# Altium PCB hexboard_35.PcbDoc
Units mm, origin at the board's own origin, x right, y up, seen from the top; angles counter-clockwise.
Board outline 70 x 60.62 mm, 2 copper layers (Top Layer, Bottom Layer); 63 components, 40 nets, 247 pads, 13 vias.
Unrouted connection lines stored in the file: 117.
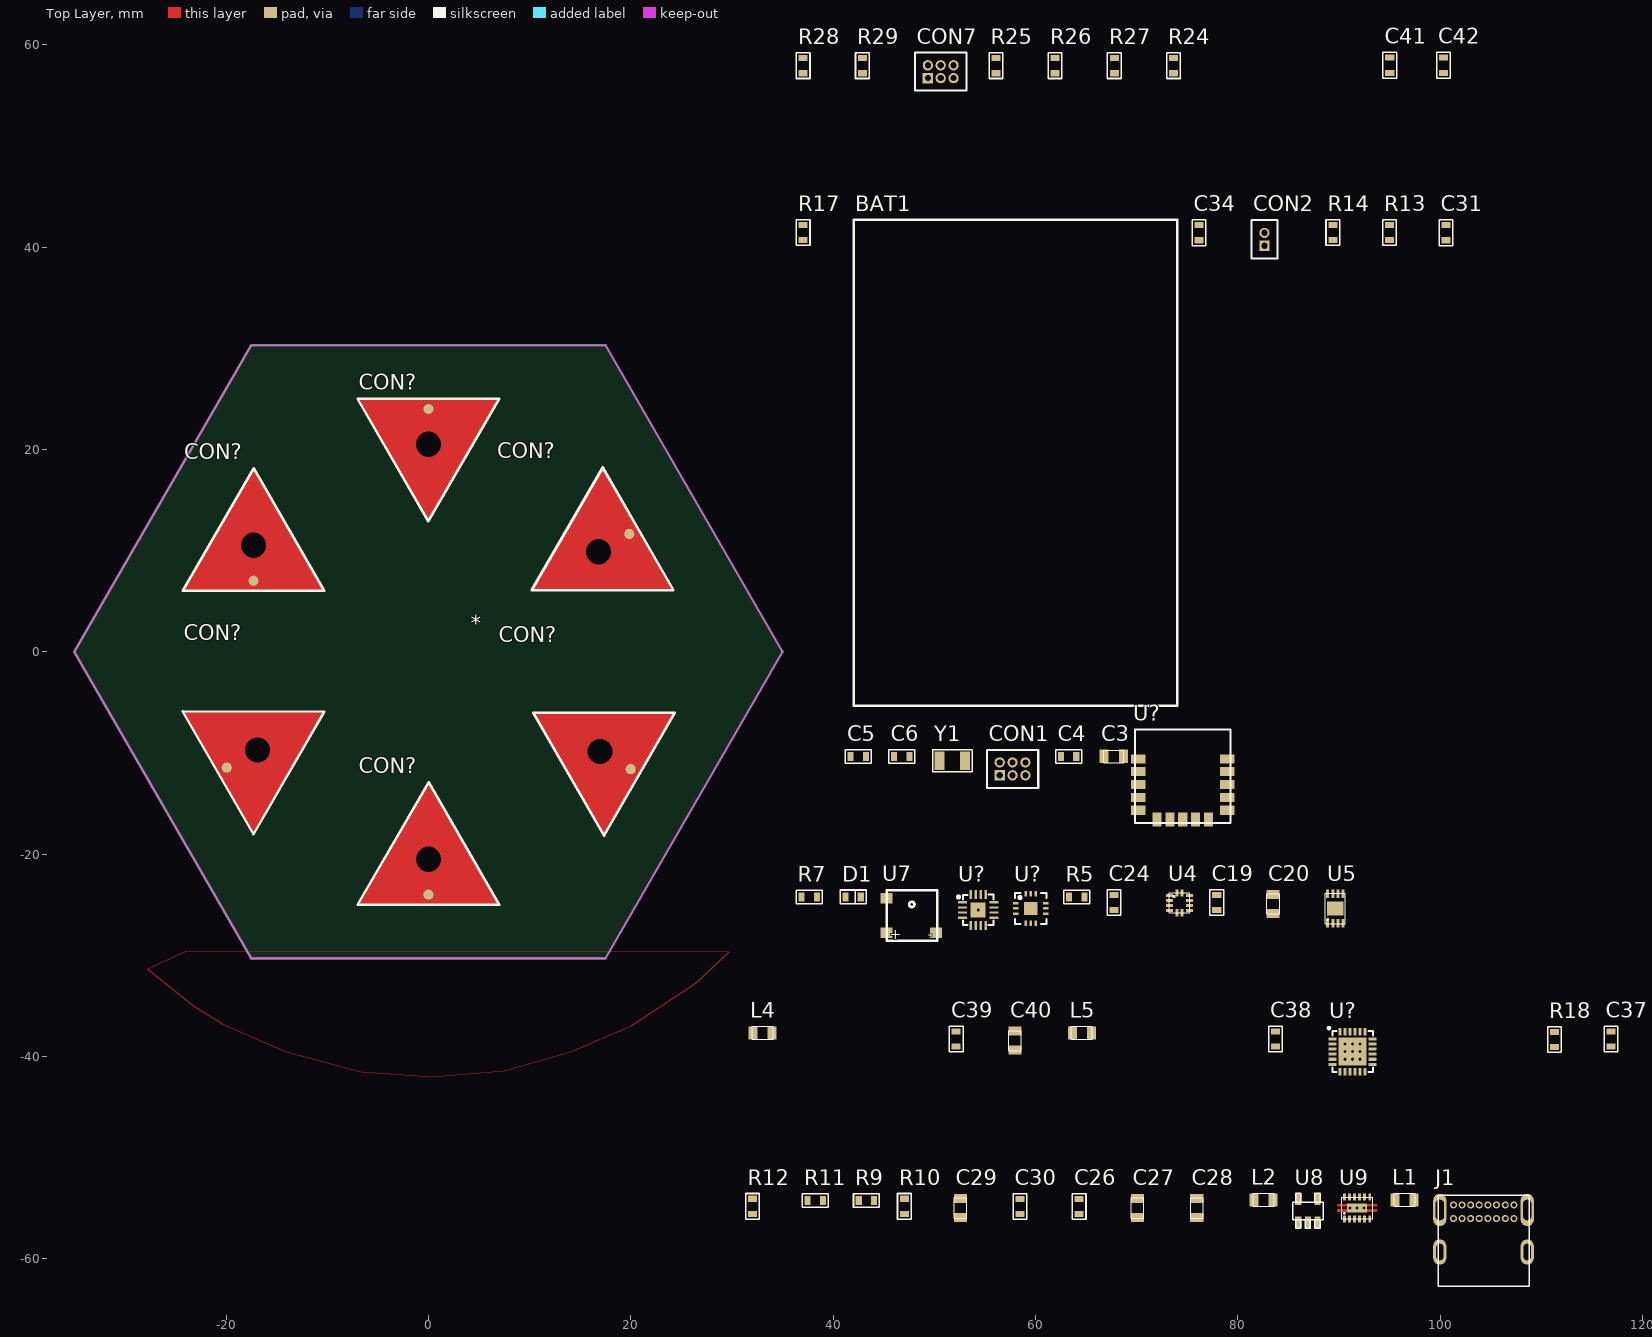
[diagram p0: Top Layer view]
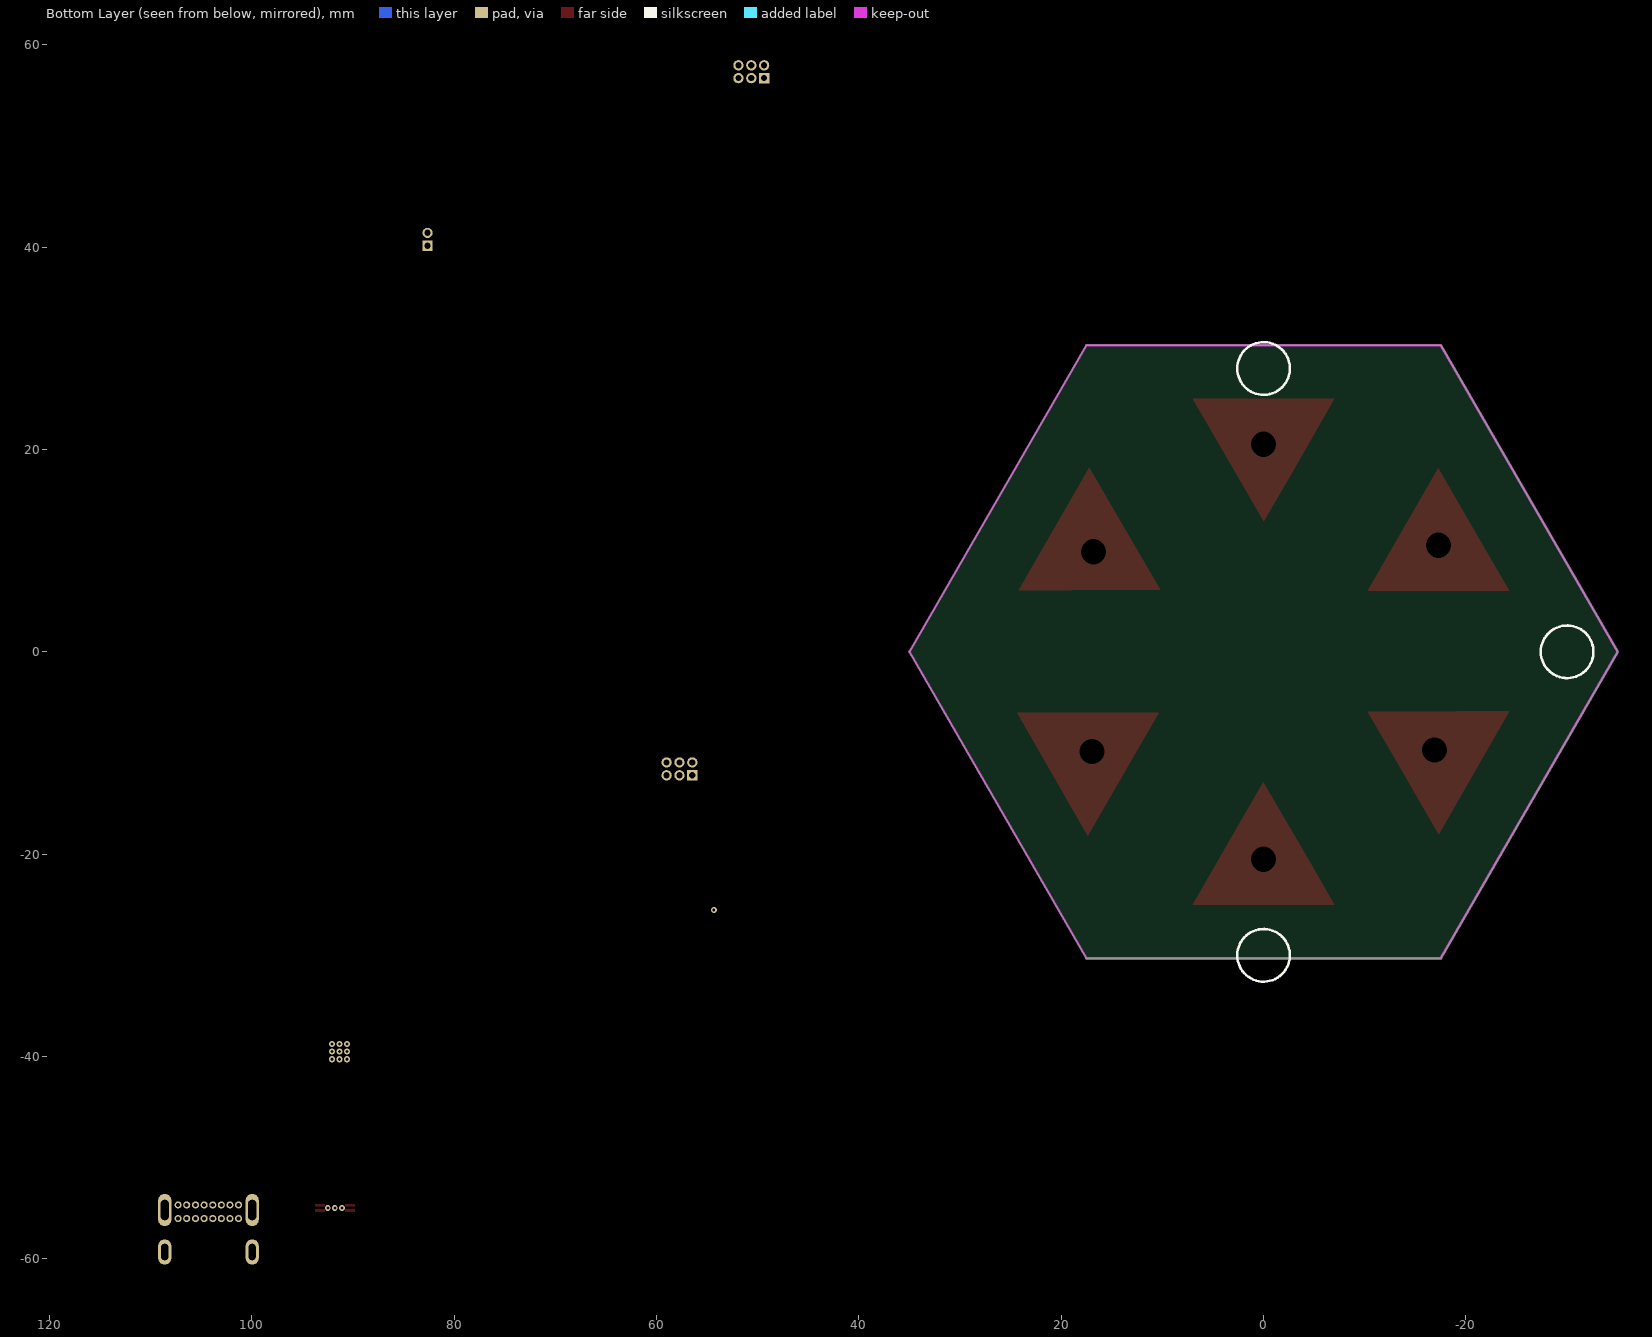
[diagram p1: Bottom Layer view, seen from below]

## Layer stack, top to bottom
Top Solder: solder mask 0.0102, Solder Resist, Dk 3.5
Top Layer: signal copper 0.0356
Dielectric1: dielectric 0.32, FR-4, Dk 4.8
Bottom Layer: signal copper 0.0356
Bottom Solder: solder mask 0.0102, Solder Resist, Dk 3.5

## Board outline
-17.5,-30.311 17.5,-30.311 35,0 17.5,30.311 -17.5,30.311 -35,0

## Design rules (kind name [scope] priority, off if disabled: settings)
Clearance [All] p1: gap=0.203 ignorepadtopadclearanceinfootprint=FALSE except(0: Arc-Hole Track-Hole SMDPad-Hole THPad-Hole Via-Hole Fill-Hole Poly-Hole Region-Hole Text-Hole; 0.102: Arc-SMDPad Arc-THPad Arc-Via Track-SMDPad Track-THPad Track-Via SMDPad-SMDPad SMDPad-THPad SMDPad-Via THPad-THPad THPad-Via)
ComponentClearance [All] p1 off: gap=0.254 collisioncheckmode=3 verticalgap=0.254 showdistances=FALSE
HoleSize [All] p1: absolutevalues=TRUE maxlimit=3.81 minlimit=0.025 maxpercent=80.000 minpercent=20.000
PlaneConnect [All] p1: planeconnectstyle=Direct reliefexpansion=0.508 reliefentries=4 reliefconductorwidth=0.254 reliefairgap=0.254
PolygonConnect PolygonConnect_vias [All] p1: thpad.connectstyle=Direct thpad.reliefconductorwidth=0.254 thpad.reliefentries=4 thpad.polygonreliefangle="90 Angle" thpad.airgapwidth=0.254 smdpad.connectstyle=Relief smdpad.reliefconductorwidth=0.254 smdpad.reliefentries=4 smdpad.polygonreliefangle="90 Angle" smdpad.airgapwidth=0.254 via.connectstyle=Direct via.reliefconductorwidth=0.254 via.reliefentries=4 via.polygonreliefangle="90 Angle" via.airgapwidth=0.254
RoutingVias [All] p1: holewidth=0.406 width=0.635 viastyle="Through Hole" minholewidth=0.254 minwidth=0.457 maxholewidth=0.406 maxwidth=1.27
SilkToSolderMaskClearance SilkscreenOverComponentPads [IsPad] p1: minsilkscreentomaskgap=0.254 clearancetoexposedcopper=TRUE
SolderMaskExpansion [All] p1: expansion=0.076 istentingtop=FALSE
Width [All] p1: maxlimit=2.54 minlimit=0.203 preferedwidth=0.203 minimp=50.000000 maximp=50.000000 favimp=50.000000
26 further rules are at their usual default settings.

## Classes and differential pairs
component class Accessories: C19 C20 C24 D1 R5 R7 U4 U5 U7 U?
component class Supply: BAT1 BT1 C26 C27 C28 C29 C30 C31 C34 CON2 J1 L1 L2 R9 R10 R11 R12 R13 R14 R17 U8 U9
component class CPU: * C3 C4 C5 C6 CON1 U? Y1
component class Touch_panel: C37 C38 C39 C40 C41 C42 CON7 CON? L4 L5 R18 R24 R25 R26 R27 R28 R29 U?

## Components (designator, comment, footprint, x,y, rotation, side; value= is the part's Value field where it differs from the comment)
* "LOGO" NEWLOGO2 5.7,-0.2 r0 top
BAT1 "BAT" "LI-ion battery 1100mAh" 74.03,-5.32 r90 top
C3 "1uF" C0805L 67.73,-10.32 r0 top
C4 "100nF" C0603L 63.28,-10.32 r0 top
C5 "8.2pF" C0603L 42.48,-10.32 r0 top
C6 "8.2pF" C0603L 46.78,-10.32 r0 top
C19 "100nF" C0603L 77.88,-24.77 r90 top
C20 "10uF" C0805L 83.48,-24.92 r90 top
C24 "100nF" C0603L 67.73,-24.77 r90 top
C26 "1uF" C0603L 64.28,-54.82 r90 top
C27 "10uF" C0805L 70.08,-54.97 r90 top
C28 "10uF" C0805L 75.93,-54.97 r90 top
C29 "10uF" C0805L 52.58,-54.97 r90 top
C30 "100nF" C0603L 58.43,-54.82 r90 top
C31 "1uF" C0603L 100.53,41.43 r90 top
C34 "100nF" C0603L 76.13,41.43 r90 top
C37 "100nF" C0603L 116.829,-38.27 r90 top
C38 "100nF" C0603L 83.679,-38.27 r90 top
C39 "100nF" C0603L 52.13,-38.27 r90 top
C40 "10uF" C0805L 57.98,-38.42 r90 top
C41 "100nF" C0603L 94.98,57.98 r90 top
C42 "1uF" C0603L 100.28,57.98 r90 top
CON1 "SWD" HDR2x3_1mm27 57.73,-11.57 r0 top
CON2 "Battery" HDR1X2_1mm27 82.63,40.13 r90 top
CON7 "SWD" HDR2x3_1mm27 50.63,57.33 r0 top
CON? "Header1" P_CAP_TRIANGLE_14 1107,1125 r180 top
CON? "Header1" P_CAP_TRIANGLE_14 -1107,-1125 r0 top
CON? "Header1" P_CAP_TRIANGLE_14 -1526.925,396.74 r300 top
CON? "Header1" P_CAP_TRIANGLE_14 1526.844,-396.54 r120 top
CON? "Header1" P_CAP_TRIANGLE_14 419.987,-1520.786 r60 top
CON? "Header1" P_CAP_TRIANGLE_14 -1124.285,-1093.979 r0 top
D1 "4148" 0603-DIODE 41.23,-24.22 r0 top
J1 "USB_C_16_PIN" USB_C_16_PIN 99.779,-62.72 r0 top
L1 "2.2uH" L0805 96.479,-54.17 r0 top
L2 "EMI 300R/100MHz" L0805 82.529,-54.17 r0 top
L4 "BLM18PG471SN1" L0805 33.03,-37.67 r0 top
L5 "BLM18PG471SN1" L0805 64.58,-37.67 r0 top
R5 "RES" 1608[0603] 64.08,-24.22 r0 top
R7 "100k" 1608[0603] 37.63,-24.22 r0 top
R9 "2k-1%" 1608[0603] 43.28,-54.22 r0 top
R10 "100R" 1608[0603] 47.03,-54.82 r90 top
R11 "4k7*" 1608[0603] 38.23,-54.22 r0 top
R12 "1M" 1608[0603] 32.03,-54.82 r90 top
R13 "33k" 1608[0603] 94.98,41.43 r90 top
R14 "47k" 1608[0603] 89.38,41.43 r90 top
R17 "100k" 1608[0603] 37.03,41.43 r90 top
R18 "100k" 1608[0603] 111.279,-38.32 r90 top
R24 "1k" 1608[0603] 73.63,57.93 r90 top
R25 "1k" 1608[0603] 56.08,57.93 r90 top
R26 "1k" 1608[0603] 61.93,57.93 r90 top
R27 "1k" 1608[0603] 67.78,57.93 r90 top
R28 "1k" 1608[0603] 37.03,57.93 r90 top
R29 "1k" 1608[0603] 42.88,57.93 r90 top
U4 "LIS2DH12" LGA50P200X200X100-12N 74.23,-24.82 r0 top
U5 "ATECC508A" UDFN 88.88,-26.82 r0 top
U7 "BUZZER" SMT28 45.28,-28.57 r0 top
U8 "MCP73831" SOT23-5 86.929,-55.17 r0 top
U9 "TPS62742DSS" R-PWSON-N12_2 91.779,-54.97 r0 top
U? "MAS6240" QFN50P300X300X100-12L 59.53,-25.37 r0 top
U? "PCA6408ABS" HVQFN16_3x3x085 54.33,-25.52 r0 top
U? "YJ-17095-nRF52832" YJ-17095 69.85,-16.93 r0 top
U? "ATSAML10_24" QFN24_4x4 91.329,-39.52 r0 top
Y1 "32768" X_FC-13F 51.78,-10.77 r0 top

## Footprints (in the part's own frame and the unit in brackets; to place one, negate y for a bottom-side part, rotate by r counter-clockwise, add the part's x,y. Pads: shape width x height; smd on the part's side, far side on the other; paste and mask are expansions set on the pad)
0603-DIODE [mm]
  rect 0.6x0.9 smd: 1(0,0) 2(1.5,0)
  silkscreen extent -0.52,-0.68 2.03,0.67, body extent -0.05,-0.4 1.55,0.4, height 0.66
1608[0603] [mm] "Body 1.6 x 0.8 mm (LxW typ)"
  rect 0.6x0.9 smd: 1(-0.75,-0.01) 2(0.76,-0.01)
  silkscreen extent -1.27,-0.68 1.28,0.67, body extent -0.75,-0.43 0.79,0.42, height 0.45
C0603L [mm]
  rect 0.6x0.9 smd: 1(-0.76,-0.03) 2(0.75,-0.03)
  silkscreen extent -1.28,-0.71 1.27,0.64, body extent -0.8,-0.43 0.8,0.37, height 0.8
C0805L [mm]
  rect 0.9x1.3 smd: 1(-0.95,0) 2(0.95,0)
  silkscreen extent -0.99,-0.64 0.99,0.61, body extent -1,-0.62 1,0.63, height 0.6
HDR1X2_1mm27 [mil]
  rect 40x40 hole 25: 1(0,0)
  round 40 hole 25: 2(50.02,-0.01)
  silkscreen extent -50,-50 101,50
HDR2x3_1mm27 [mil]
  rect 40x40 hole 24: 1(-50,-25)
  round 40 hole 24: 2(-50,25) 3(0,-25) 4(0,25) 5(50,-25) 6(50,25)
  silkscreen extent -100,-74 100,74
HVQFN16_3x3x085 [mm]
  rect 0.9x0.24 smd paste-0.025 mask+0.05: 1(-1.55,0.75) 2(-1.55,0.25) 3(-1.55,-0.25) 4(-1.55,-0.75) 9(1.55,-0.75) 10(1.55,-0.25) 11(1.55,0.25) 12(1.55,0.75)
  rect 0.24x0.9 smd paste-0.025 mask+0.05: 5(-0.75,-1.55) 6(-0.25,-1.55) 7(0.25,-1.55) 8(0.75,-1.55) 13(0.75,1.55) 14(0.25,1.55) 15(-0.25,1.55) 16(-0.75,1.55)
  rect 1.5x1.5 smd paste-2.54 mask+0.05: 17(0,0)
  silkscreen extent -2.07,-1.5 1.5,1.51, body extent -1.52,-1.52 1.53,1.52, height 1.01
L0805 [mm] "Chip Inductor; Body 2.0 x 1.3 mm (LxW typ)"
  rect 0.9x1.3 smd: 1(-0.94,0) 2(0.94,0)
  silkscreen extent -1.03,-0.62 1.05,0.64, body extent -0.99,-0.59 1.01,0.61, height 1.3
LGA50P200X200X100-12N [mm] "LGA, 12-Leads, Body 2.00x2.00mm, Pitch 0.50mm, IPC Medium Density"
  rect 0.7x0.3 smd paste-0.025 mask+0.05: 1(-0.975,0.75) 2(-0.975,0.25) 3(-0.975,-0.25) 4(-0.975,-0.75) 7(0.975,-0.75) 8(0.975,-0.25) 9(0.975,0.25) 10(0.975,0.75)
  rect 0.3x0.7 smd paste-0.025 mask+0.05: 5(-0.25,-0.975) 6(0.25,-0.975) 11(0.25,0.975) 12(-0.25,0.975)
  silkscreen extent -0.99,-1 1,1, body extent -1,-1 1,1, height 1.01
"LI-ion battery 1100mAh" [mm]
  round 1.524 on Top Overlay: 1(47,30) 2(47,28) 3(47,26)
  silkscreen extent 0,0 48,32, body extent 0,0 48,32, height 6.4
NEWLOGO2 [mm]
P_CAP_TRIANGLE_14 [mm]
  round 1 smd mask+0.102: 1(1107,1101)
  round 0 hole 2.5 unplated: 2(1107,1104.5)
  Top Layer region: 1107.02,1112.12 1102.606,1104.5 1100,1100 1114,1100 1109.64,1107.58
  silkscreen extent 1100,1100 1114,1112.12
QFN24_4x4 [mm]
  rect 0.75x0.3 smd mask+0.05: 1(-1.975,1.25) 2(-1.975,0.75) 3(-1.975,0.25) 4(-1.975,-0.25) 5(-1.975,-0.75) 6(-1.975,-1.25) 13(1.975,-1.25) 14(1.975,-0.75) 15(1.975,-0.25) 16(1.975,0.25) 17(1.975,0.75) 18(1.975,1.25)
  rect 0.3x0.75 smd mask+0.05: 7(-1.25,-1.975) 8(-0.75,-1.975) 9(-0.25,-1.975) 10(0.25,-1.975) 11(0.75,-1.975) 12(1.25,-1.975) 19(1.25,1.975) 20(0.75,1.975) 21(0.25,1.975) 22(-0.25,1.975) 23(-0.75,1.975) 24(-1.25,1.975)
  rect 2.75x2.75 smd paste-100 mask+0.05: 25(0,0)
  silkscreen extent -2.45,-2.03 2.03,2.45, body extent -2,-2 2,2, height 1
QFN50P300X300X100-12L [mm] "QFN, 12-Leads, Body 3.0x3.0mm (max), Pitch 0.50mm, IPC High Density"
  rect 0.55x0.25 smd: 1(-1.475,0.5) 2(-1.475,0) 3(-1.475,-0.5) 7(1.475,-0.5) 8(1.475,0) 9(1.475,0.5)
  rect 0.25x0.55 smd: 4(-0.5,-1.475) 5(0,-1.475) 6(0.5,-1.475) 10(0.5,1.475) 11(0,1.475) 12(-0.5,1.475)
  rect 1.3x1.3 smd: 13(0,0)
  silkscreen extent -1.55,-1.55 1.55,1.55, body extent -1.51,-1.51 1.51,1.51, height 0.78
R-PWSON-N12_2 [mm]
  rect 0.28x0.7 smd paste-1000 mask+0.05: 1(-1.25,-1.1) 2(-0.75,-1.1) 3(-0.25,-1.1) 4(0.25,-1.1) 5(0.75,-1.1) 6(1.25,-1.1) 7(1.25,1.1) 8(0.75,1.1) 9(0.25,1.1) 10(-0.25,1.1) 11(-0.75,1.1) 12(-1.25,1.1)
  rect 2x0.9 smd paste-1000 mask+0.05: 13(0,0)
  Top Layer region: -2,0.125 -1,0.125 -1,0.375 -2,0.375
  Top Layer region: -2,-0.375 -1,-0.375 -1,-0.125 -2,-0.125
  Top Layer region: 1.975,-0.125 0.975,-0.125 0.975,-0.375 1.975,-0.375
  Top Layer region: 1.975,0.375 0.975,0.375 0.975,0.125 1.975,0.125
  silkscreen extent -1.55,-1.05 1.55,1.06, body extent -1.55,-1.06 1.55,1.06, height 0.8
SMT28 [mm]
  rect 1.2x1.016 smd: 0(0,4.2) 1(0,0.8) 2(4.9,0.8)
  silkscreen extent 0,0 5,5, body extent 0,-0.03 5.02,4.97, height 2
SOT23-5 [mil]
  rect 24x45 smd: 1(-38,-48) 2(-0.5,-48) 3(37,-48) 4(37,42) 5(-38,42)
  silkscreen extent -59,-71 59,65, body extent -60,-62 58,56, height 58
UDFN [mm]
  rect 1.6x1.4 smd: 0(0.75,1.45)
  rect 0.3x0.85 smd paste-0.025 mask+0.05: 1(0,0) 1(0,0) 2(0.5,0) 2(0.5,0) 3(1,0) 4(1.5,0) 5(1.5,2.9) 6(1,2.9) 7(0.5,2.9) 8(0,2.9)
  silkscreen extent -0.25,-0.05 1.75,2.95, body extent -0.25,-0.05 1.75,2.95, height 0.53
USB_C_16_PIN [mm]
  oval 1.3x2.5 hole 0.7 slot 1.6 at 90 deg: 0(0.18,3.4) 0(8.82,3.4)
  oval 1.3x3.2 hole 0.8 slot 2 at 90 deg: 0(0.18,7.55) 0(8.82,7.55)
  round 0.7 hole 0.4: A1(1.53,8.05) A4(2.38,8.05) A5(3.23,8.05) A6(4.075,8.05) A7(4.925,8.05) A8(5.78,8.05) A9(6.65,8.05) A12(7.5,8.05) B1(7.5,6.7) B4(6.65,6.7) B5(5.78,6.7) B6(4.925,6.7) B7(4.075,6.7) B8(3.23,6.7) B9(2.38,6.7) B12(1.53,6.7)
  silkscreen extent 0,0 9,9, body extent 0.02,-0.03 8.97,9.14, height 3.46
X_FC-13F [mm] "Crystal 3.2x1.5x0.55"
  rect 1x1.8 smd: 1(-1.255,0) 2(1.245,0)
  silkscreen extent -1.96,-1.1 1.94,1.1, body extent -1.56,-0.72 1.64,0.78, height 0.9
YJ-17095 [mm] "nRF52805 BLE5.0 module"
  rect 1.4x0.9 smd mask+0.05: 1(0.3,6.35) 2(0.3,5.08) 3(0.3,3.81) 4(0.3,2.54) 5(0.3,1.27) 11(9.1,1.27) 12(9.1,2.54) 13(9.1,3.81) 14(9.1,5.08) 15(9.1,6.35)
  rect 0.9x1.4 smd mask+0.05: 6(2.16,0.35) 7(3.43,0.35) 8(4.7,0.35) 9(5.97,0.35) 10(7.24,0.35)
  silkscreen extent 0,0 9.4,9.25, body extent 0,0 9.4,9.25, height 1.7

## Part data
BAT1: library part iPod_LiPol, "Li-Pol battery"
C3 C4 C5 C6 C19 C20 C24 C26 C27 C28 C29 C30 C31 C34 C37 C38 C39 C40 C41 C42: library part CAP, "Capacitor"
CON1 CON7: library part "Header 3X2", "Header, 3-Pin, Dual row", LatestRevisionDate=17-Jul-2002, LatestRevisionNote="Re-released for DXP Platform.", Publisher="Altium Limited"
CON2: library part "Header 2", "Header, 2-Pin", LatestRevisionDate=17-Jul-2002, LatestRevisionNote="Re-released for DXP Platform.", Publisher="Altium Limited"
D1: library part D, "DIODE"
J1: "USB-C", Package=None, Availability=Unavailable, MF="Amphenol ICC", MP=12401598E4#2A, Price=None, SnapEDA_Link=https://www.snapeda.com/parts/12401598E4%232A/Amphenol%20FCI/view-part/2762372/?ref=snap
L1 L2 L4 L5: library part INDUCTOR
R7 R9 R10 R11 R12 R13 R14 R17 R18 R24 R25 R26 R27 R28 R29: library part RES
U4: "3-axis - ±2g/±4g/±8g/±16g digital output femto accelerometer", 2nd source part number=243-3081, Manufacturer=STMicroelectronics, Part number IPS=00000007817, Supplier part number=497-14851-1-ND, 2nd source Supplier=Farnell, Artikkelnr Noca=N.A., Artikkelnr Simpro=N.A., Datasheet=http://www.st.com/st-web-ui/static/active/en/resource/technical/document/datasheet/DM00091513.pdf, Footprint Doc=LGA-12, LatestRevisionDate=2015-09-29, Manufacturer Part Number=LIS2DH12, Note="MEMS digital output motion sensor ultra low-power high performance 3-axes \"femto\" accelerometer", Part Number=LIS2DH12, Pin Count=12, Published=2015-09-29, Publisher="Nordic Semiconductor", Supplier=Digi-Key
U5: "Atmel CryptoAuthentication Device"
U8: "Fully Integrated Li-Ion, / Li-Polymer Charge Management Controllers"
U?: "Carg pump piezzo driver"
U?: "nRF52805 BLE5.0 module", Montage=SMD
U?: library part ATSAML10D15, "Cortex M0+ microcontroller"
Y1: library part CRYSTAL, "Crystal"
U?: Montage=SMD

## Via types
v1: diameter 0.6, hole 0.3, Top Layer to Bottom Layer, 9 vias
v2: diameter 0.554, hole 0.3, Top Layer to Bottom Layer, 3 vias
v3: diameter 0.61, hole 0.254, Top Layer to Bottom Layer, 1 vias

## Nets (pads, with @x,y where several pads share a name; then routed paths per layer and width w, separated by ;. In a path a pad name is that pad's centre, name@x,y a point inside that pad or via, vN(x,y) a via of type N, cw(c..) or ccw(c..) an arc to the next point about the centre after c; other vN are vias at no path point)
ACCEL_INT_1: U4.12 U?.14@78.95,-11.85
BUZ: R7.2
CHRG_MON: R10.1
CHRG_PRG: R9.1 R11.2
GND: C3.2 C4.2 C5.2 C6.2 C19.2 C20.2 C24.2 C26.2 C27.2 C28.2 C29.2 C30.2 C31.2 C34.2 C37.2 C38.2 C39.2 C40.2 C41.2 C42.2 CON1.1 CON2.2 CON7.1 J1.0 J1.A1 J1.A12 J1.B1 J1.B12 R7.1 R11.1 R12.1 R14.1 R17.1 U4.3 U4.5 U4.6 U4.7 U4.8 U5.4 U8.2 U9.3 U9.10 U9.11 U9.13 U?.9@91.079,-41.495 U?.15@78.95,-10.58 U?.21
  other v2: 91.079,-54.97 91.779,-54.97 92.479,-54.97
LED_1: R26.1
LED_2: R27.2
LED_3: R29.2
LED_4: R28.2
LED_5: R24.2
LED_6: R25.1
MAX_AL: R17.2
NetC38_1: C38.1 L5.2 U?.20
NetC41_1: C41.1 C42.1 L4.1 U?.8@90.579,-41.495
NetD1_1: D1.1 U7.1
NetD1_2: D1.2 R5.1 U7.2
NetJ1_A4: J1.A4 J1.A9 J1.B4 J1.B9 L2.1
NetL1_1: L1.1 U9.2
NetL5_1: L5.1 U?.22
NetR9_2: R9.2 U8.5
NetR10_2: R10.2 U8.1
NetR12_2: R12.2 U9.4
NetU?_6: U?.6@54.08,-27.07 U?.17@54.33,-25.52
  other v3: 54.33,-25.52
SCL: U4.1 U5.6 U?.12@78.95,-14.39
SCL_TOUCH: U?.6@72.01,-16.58
SDA: U4.4 U5.5 U?.13@78.95,-13.12
SDA_TOUCH: U?.5@70.15,-15.66
SWDCLK: CON1.4 U?.2@70.15,-11.85
SWDIO: CON1.2 U?.1@70.15,-10.58
SWDRST/BUZ: CON1.3 U?.3@70.15,-13.12
T_RESET: C37.1 CON7.3 R18.2 U?.19
T_SWDCLK: CON7.4
T_SWDIO: CON7.2
USB_DETECT: R13.1 R14.2
VBAT: C27.1 C28.1 C34.1 CON2.1 R5.2 U8.3 U9.1 U9.8 U9.9 U9.12
VCPU: C3.1 C4.1 C19.1 C20.1 C24.1 C29.1 C30.1 C39.1 C40.1 CON1.5 CON7.5 L1.2 L4.2 R18.1 U4.2 U4.9 U4.10 U5.8 U9.5 U?.11@78.95,-15.66 U?.23
VPER: C31.1 U9.6
VUSB: C26.1 L2.2 R13.2 U8.4
XL1: C5.1 U?.9@75.82,-16.58 Y1.1
XL2: C6.1 U?.10@77.09,-16.58 Y1.2
pads on no net: BAT1.1 BAT1.2 BAT1.3 CON1.6 CON7.6 CON?.1 CON?.2 J1.A5 J1.A6 J1.A7 J1.A8 J1.B5 J1.B6 J1.B7 J1.B8 R24.1 R25.2 R26.2 R27.1 R28.1 R29.1 U4.11 U5.0 U5.1 U5.2 U5.3 U5.7 U7.0 U9.7 U?.1@52.78,-24.77 U?.1@58.055,-24.87 U?.1@89.354,-38.27 U?.2@52.78,-25.27 U?.2@58.055,-25.37 U?.2@89.354,-38.77 U?.3@52.78,-25.77 U?.3@58.055,-25.87 U?.3@89.354,-39.27 U?.4 U?.5@53.58,-27.07 U?.5@59.53,-26.845 U?.5@89.354,-40.27 U?.6@60.03,-26.845 U?.6@89.354,-40.77 U?.7 U?.8@55.08,-27.07 U?.8@61.005,-25.37 U?.8@74.55,-16.58 U?.9@55.88,-26.27 U?.9@61.005,-24.87 U?.10@55.88,-25.77 U?.10@60.03,-23.895 U?.10@91.579,-41.495 U?.11@55.88,-25.27 U?.11@59.53,-23.895 U?.11@92.079,-41.495 U?.12@55.88,-24.77 U?.12@59.03,-23.895 U?.12@92.579,-41.495 U?.13@55.08,-23.97 U?.13@59.53,-25.37 U?.13@93.304,-40.77 U?.14@54.58,-23.97 U?.14@93.304,-40.27 U?.15@54.08,-23.97 U?.15@93.304,-39.77 U?.16 U?.17@93.304,-38.77 U?.18 U?.24 U?.25
copper on no net:
  other v1: 90.579,-40.27 91.329,-40.27 92.079,-40.27 90.579,-39.52 91.329,-39.52 92.079,-39.52 90.579,-38.77 91.329,-38.77 92.079,-38.77

## Polygon pours and split planes (outlines as drawn)
GND on Top Layer "NONET_L01_P000" (solid, shelved, pour order 0): -20.45,-36.75 -14.069,-39.55 -6.65,-41.5 0.4,-42 7.5,-41.4 14.089,-39.55 20.05,-36.95 26.4,-32.75 29.7,-29.7 -23.9,-29.6 -27.745,-31.4 -23.25,-35 -20.4,-36.75

## Keep-outs
Keep-Out Layer:
  the board outline again, w0.254

## Silkscreen, mask and mechanical layers (free items; w line width, h text height)
Bottom Overlay:
  circle w0.254: c0,-30 r2.6
  circle w0.254: c0,28 r2.6
  circle w0.254: c-30,0 r2.6
Dimensions:
  circle w0.254: c0,0 r39
  lines w0.254: -65.75,0 0,0 ; -49.5,-30.3 49.5,-30.3 ; -49.5,-25 53.8,-25 ; -48.9,25 51.8,25 ; -41.485,-23.815 0,0 ; -41.044,23.875 0,0 ; -27.325,47.566 0,0 ; -25.403,-43.832 0,0 ; -13.3,-51.65 -13.3,49 ; -13.3,-25 -27.734,0 -13.3,25 ; 0,-65.7 0,-0.1 ; 0,51.8 0,0 ; 13.3,-53.95 13.3,48.15 ; 13.3,-25 27.74,0 ; 13.3,25 27.734,0 ; 20.2,-46.4 20.2,53.6 ; 24.924,43.345 0,0 ; 25.194,-43.189 0,0 ; 42.577,-24.694 0,0 ; 47.292,28.08 0,0 ; 63.7,0 0,0
Technical:
  lines w0.254: 0,-25 0,-12.88 ; 0,25 0,12.88 ; 17.773,-17.253 23.779,-6.85 11.8,-6.85 ; 17.8,-17.3 11.8,-6.85 ; 20.776,-12.05 11.8,-6.85 ; -20.761,12.077 -23.779,6.85 -23.8,6.85 -11.75,6.85 ; -20.761,12.077 -11.75,6.85 ; -20.761,12.077 -17.75,17.3 -11.75,6.85 ; 0,-12.88 7,-25 -7,-25 0,-12.88 ; 0,12.88 7,25 -7,25 0,12.88

## Text inside footprints (layer, text, board x,y; h text height)
U7: Top Overlay "-" at 49.34,-28.43 h1; Top Overlay "+" at 45.57,-28.42 h1